# Altium PCB control_circuit.PcbDoc (part 1 of 3)
Units mil, origin at the board's own origin, x right, y up, seen from the top; angles counter-clockwise.
Board outline 3202 x 1176 mil, 2 copper layers (Top Layer, Bottom Layer); 71 components, 80 nets, 328 pads, 216 vias.
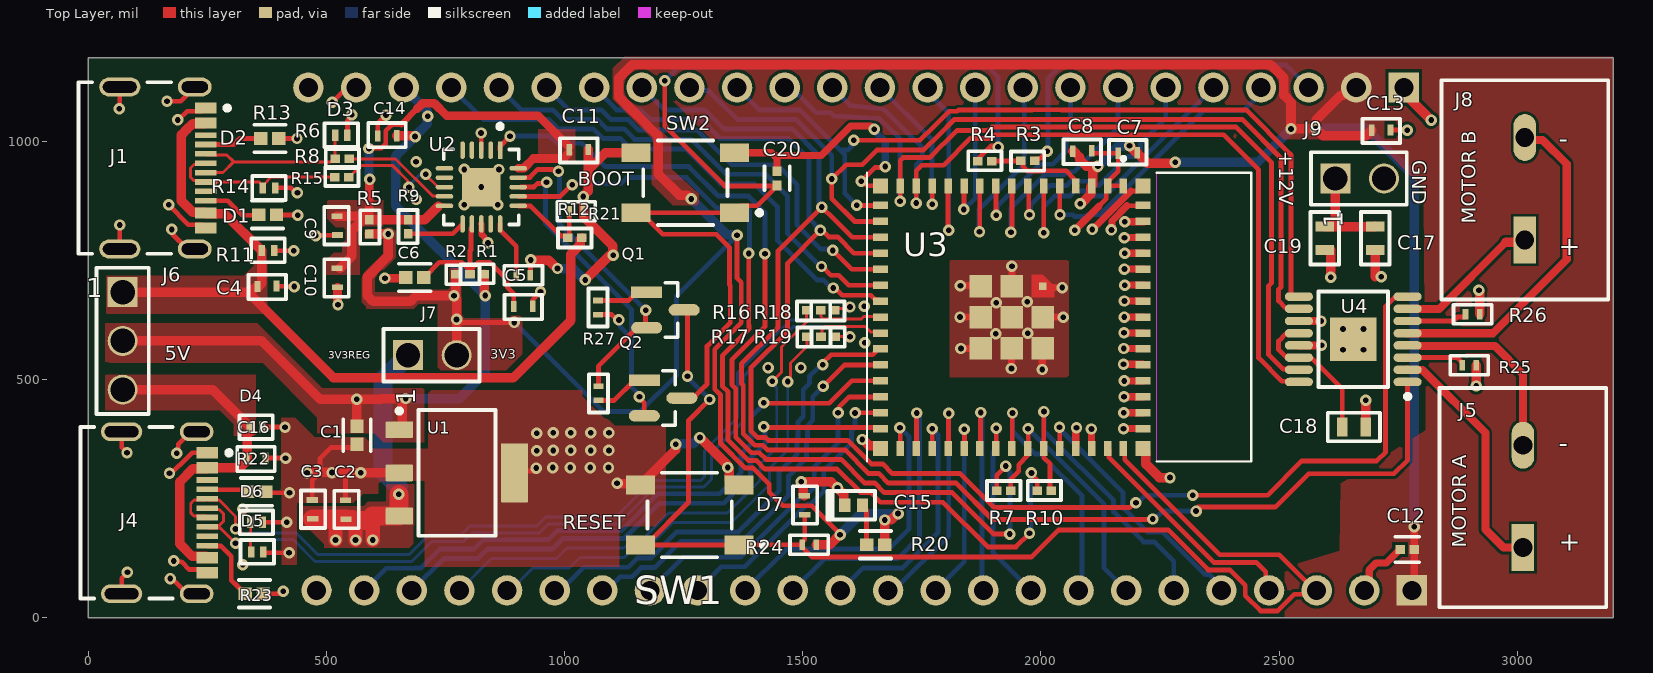
[diagram p0: Top Layer view]
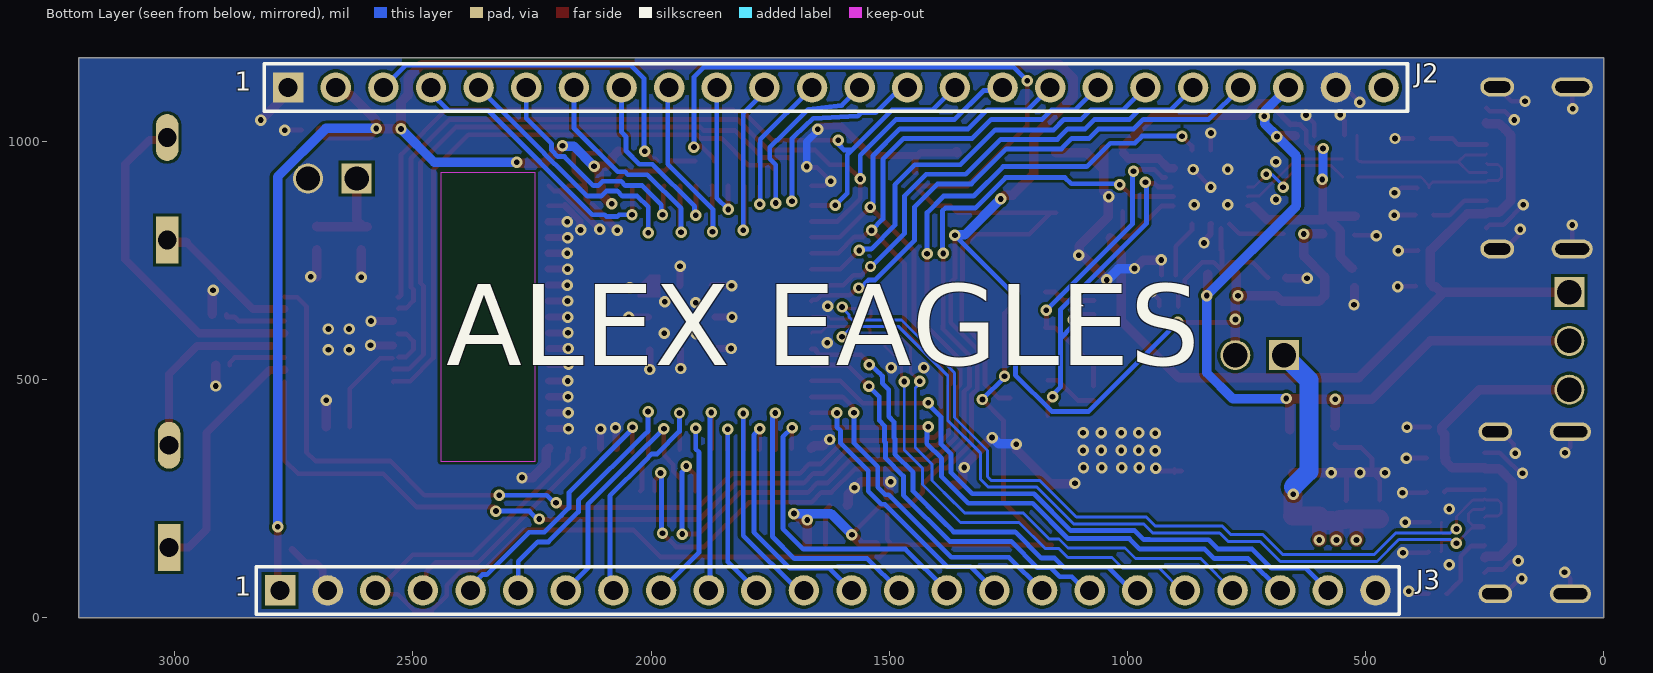
[diagram p1: Bottom Layer view, seen from below]
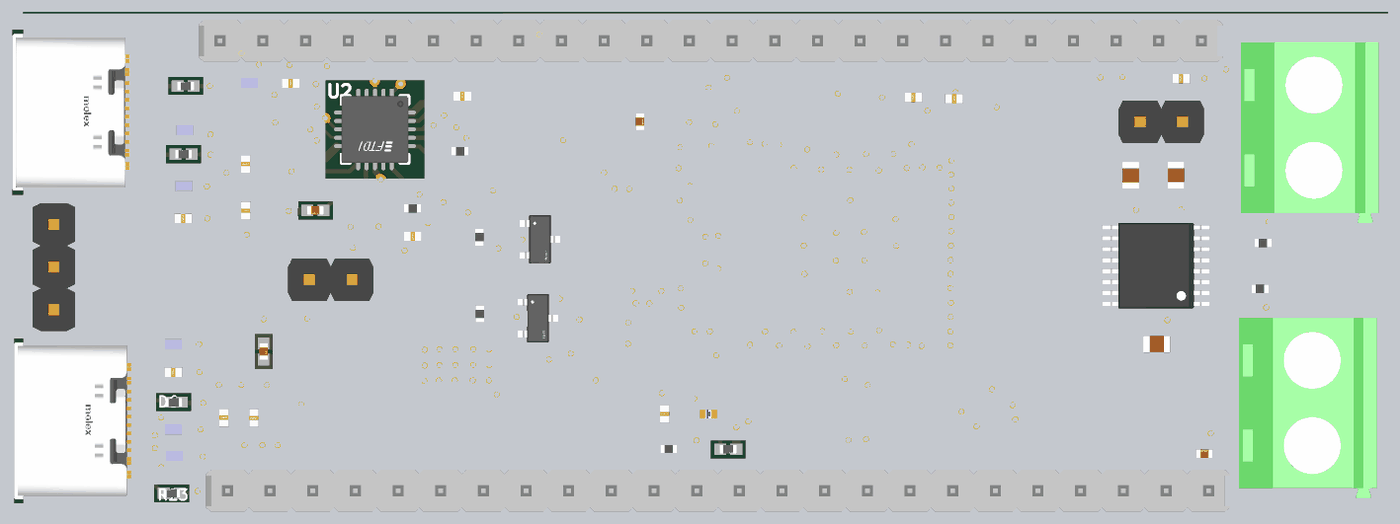
[diagram p3: 3D render of the assembled board from above, using the file's embedded part models]

## Layer stack, top to bottom
Top Solder: solder mask 0.4, Solder Resist, Dk 3.5
Top Layer: signal copper 1.4
Dielectric 1: dielectric 12.6, FR-4, Dk 4.8
Bottom Layer: signal copper 1.4
Bottom Solder: solder mask 0.4, Solder Resist, Dk 3.5

## Board outline
0,0 3202,0 3202,1176 0,1176

## Design rules (kind name [scope] priority, off if disabled: settings)
Clearance [All] p1: gap=6 ignorepadtopadclearanceinfootprint=TRUE
Clearance difclearance [InDifferentialPairClass('DIFF90')] p2: gap=8 ignorepadtopadclearanceinfootprint=FALSE
Clearance smaller [WithinRoom('RoomDefinition')or WithinRoom('usb1')or WithinRoom('usb2')] p3: gap=6 ignorepadtopadclearanceinfootprint=TRUE
ComponentClearance "0ohm resistors" [InComponent('R17') vs InComponent('R19')] p1: gap=0 collisioncheckmode=3 verticalgap=0 showdistances=FALSE
ComponentClearance "0ohm resistors_1" [InComponent('R16') vs InComponent('R18')] p2: gap=0 collisioncheckmode=3 verticalgap=0 showdistances=FALSE
ComponentClearance "0ohm resistors_2" [InComponent('R1') vs InComponent('R2')] p3: gap=0 collisioncheckmode=3 verticalgap=0 showdistances=FALSE
ComponentClearance [All] p4: gap=10 collisioncheckmode=3 verticalgap=10 showdistances=FALSE
DiffPairsRouting DIFF90 [InDifferentialPairClass('DIFF90')] p1: maxlimit=8.1 minlimit=8 mostfreqgap=8 toplayer_minwidth=6.03 toplayer_maxwidth=6.23 toplayer_prefwidth=6.03 bottomlayer_minwidth=6.03 bottomlayer_maxwidth=6.23 bottomlayer_prefwidth=6.03 maxuncoupledlength=500
MinimumSolderMaskSliver [All] p1: minsoldermaskwidth=1
PolygonConnect PolygonConnect_7 [All vs IsNamedPolygon('+3V3_L01_P010')] p1: connectstyle=Relief reliefconductorwidth=15 reliefentries=4 polygonreliefangle="90 Angle" airgapwidth=10
PolygonConnect PolygonConnect_6 [All vs IsNamedPolygon('+5V_L01_P004')] p2: connectstyle=Direct reliefconductorwidth=10 reliefentries=4 polygonreliefangle="90 Angle" airgapwidth=10
PolygonConnect PolygonConnect_5 [All vs IsNamedPolygon('+3V3_REG_L01_P003')] p3: connectstyle=Direct reliefconductorwidth=10 reliefentries=4 polygonreliefangle="90 Angle" airgapwidth=10
PolygonConnect PolygonConnect_4 [All vs IsNamedPolygon('+3V3_FTDI_L01_P002')] p4: connectstyle=Direct reliefconductorwidth=10 reliefentries=4 polygonreliefangle="90 Angle" airgapwidth=10
PolygonConnect PolygonConnect_3 [All vs IsNamedPolygon('+3V3_FTDI_L01_P001')] p5: connectstyle=Direct reliefconductorwidth=10 reliefentries=4 polygonreliefangle="90 Angle" airgapwidth=10
PolygonConnect PolygonConnect_2 [All vs IsNamedPolygon('+3V3_L01_P000')] p6: connectstyle=Direct reliefconductorwidth=15 reliefentries=4 polygonreliefangle="90 Angle" airgapwidth=10
PolygonConnect PolygonConnect_1 [All vs IsNamedPolygon('+3V3_L01_P000')] p7: connectstyle=Direct reliefconductorwidth=20 reliefentries=4 polygonreliefangle="90 Angle" airgapwidth=10
PolygonConnect [All] p8: connectstyle=Direct reliefconductorwidth=10 reliefentries=4 polygonreliefangle="90 Angle" airgapwidth=10
RoomDefinition usb2 [False vs False] p1: confinementstyle=ConfineIn formatcopy=TRUE lockcomponents=FALSE outline 959,1034 676,1034 676,758 959,758
RoomDefinition usb1 [False vs False] p2: confinementstyle=ConfineIn formatcopy=TRUE lockcomponents=FALSE outline 296,365 220,365 220,78 296,78
RoomDefinition [False vs False] p3: confinementstyle=ConfineIn formatcopy=TRUE lockcomponents=FALSE outline 306,1093 208,1093 208,800 306,800
RoutingVias [All] p1: holewidth=12 width=24 viastyle="Through Hole" minholewidth=12 minwidth=24 maxholewidth=12 maxwidth=24
SilkToSilkClearance [All] p1: silktosilkclearance=1
SilkToSolderMaskClearance [IsPad] p1: minsilkscreentomaskgap=1 clearancetoexposedcopper=TRUE
SolderMaskExpansion [All] p1: expansion=2 istentingtop=FALSE
SupplyNets "Schematic Supply Nets_8" [InNet('+3V3')] p1: voltage=0.000
SupplyNets "Schematic Supply Nets_7" [InNet('+5V')] p2: voltage=0.000
SupplyNets "Schematic Supply Nets_6" [InNet('GND')] p3: voltage=0.000
SupplyNets "Schematic Supply Nets_4" [InNet('+5V_BUS2')] p4: voltage=0.000
SupplyNets "Schematic Supply Nets_2" [InNet('+3V3_REG')] p5: voltage=0.000
SupplyNets "Schematic Supply Nets_1" [InNet('+5V_BUS1')] p6: voltage=0.000
SupplyNets "Schematic Supply Nets" [InNet('+12')] p7: voltage=0.000
Width Width_1 [All] p1: maxlimit=50 minlimit=6 preferedwidth=10 minimp=50.000000 maximp=50.000000 favimp=50.000000
25 further rules are at their usual default settings.

## Classes and differential pairs
differential pair class DIFF90: CON1_USB CON2_USB ESP_USB FTD1_USB
differential pair FTD1_USB: +FTD1_USB_P -FTD1_USB_N
differential pair ESP_USB: +ESP_USB_P -ESP_USB_N
differential pair CON2_USB: +CON2_USB_P -CON2_USB_N
differential pair CON1_USB: +CON1_USB_P -CON1_USB_N

## Components (designator, comment, footprint, x,y, rotation, side; value= is the part's Value field where it differs from the comment)
C1 "4.7UF,16V" 4.7uf_capacitor 599.08,409.49 r90 top value=4.7uF
C2 "100nf" "0603 capacitor" 540,215 r270 top
C3 "100nf" "0603 capacitor" 470,215.5 r270 top
C4 "100nf" "0603 capacitor" 363.5,696 r180 top
C5 "100nf" "0603 capacitor" 901.5,654 r180 top
C6 "4.7UF,16V" 4.7uf_capacitor 711.81,678.92 r0 top value=4.7uF
C7 "100nf" "0603 capacitor" 2194,975 r0 top
C8 "100nf" "0603 capacitor" 2075,980 r180 top
C9 "100nf" "0603 capacitor" 522.86,834.71 r90 top
C10 "100nf" "0603 capacitor" 523,725 r90 top
C11 "100nf" "0603 capacitor" 1018,983 r180 top
C12 "10uf" FP-CL17-IPC_C 2769,143 r180 top
C13 "100nf" "0603 capacitor" 2702.5,1024 r180 top
C14 "100nf" "0603 capacitor" 639,1011 r0 top
C15 "100nf" "0603 capacitor" 1503,224.5 r270 top
C16 "100nf" "0603 capacitor" 340.32,335 r180 top
C17 "0.1 µF" "CAP SMD" 2702,796.61 r90 top
C18 "2.2 µF" "CAP SMD" 2657.05,400.35 r0 top
C19 "10 µF" "CAP SMD" 2596,796.39 r90 top
C20 "100nf" FP-CL17-IPC_C 1446,922.1 r90 top
D1 "AQ3045-01ETG" SOD882 377.2,771 r180 top
D2 "AQ3045-01ETG" SOD882 379.2,902 r180 top
D3 "AQ3045-01ETG" SOD882 531,1013 r180 top
D4 "AQ3045-01ETG" SOD882 352.2,400 r180 top
D5 "AQ3045-01ETG" SOD882 354.52,138 r180 top
D6 "AQ3045-01ETG" SOD882 352.8,200 r180 top
D7 "green led" LED0402G 1606.7,236 r180 top
J1 "DX07S0 USPC" USP-C 29.39,1217.54 r270 top
J2 "HEADER" HDR_1X24_2.54MM 2762,1113 r90 bottom
J3 "0022284245" HDR_1X24_2.54MM 2779,57 r90 bottom locked
J4 "DX07S0 USPC" USP-C 33.27,493.62 r270 top
J5 "MOTOR A" HEADER 3037,-48 r90 top
J6 "FTS-103-01-F-S" "PIN HEADER MALE" 72,683.36 r0 top
J7 "PIN HEADER" "HEADER 1*2" 721,201 r90 top
J8 "MOTOR B" HEADER 3041,598 r90 top
J9 "PIN HEADER" "HEADER 1*2" 2668,572 r90 top
Q1 "SS8050-G" "SS8050-G TRANSISTOR" 1008.42,627.38 r0 top
Q2 "SS8050-G" "SS8050-G TRANSISTOR" 1003.42,442.38 r0 top
R1 "0 ohm" "27OHM RESISOR SMD" 816.31,762.06 r180 top value=0R
R2 "0 ohm" "27OHM RESISOR SMD" 786.21,679.94 r0 top value=0R
R3 "27ohm" "27OHM RESISOR SMD" 1972.19,918.44 r0 top value=27R
R4 "27ohm" "27OHM RESISOR SMD" 1882.31,999.06 r180 top value=27R
R5 "0 ohm" "27OHM RESISOR SMD" 631.06,820.16 r90 top value=0R
R6 "27ohm" "27OHM RESISOR SMD" 533.31,1004.06 r180 top value=27R
R7 "0 ohm" "27OHM RESISOR SMD" 1921.84,307.06 r180 top value=0R
R8 "27ohm" "27OHM RESISOR SMD" 532.31,966.06 r180 top value=27R
R9 "0 ohm" "27OHM RESISOR SMD" 630.94,820.84 r270 top value=0R
R10 "0 ohm" "27OHM RESISOR SMD" 2007.31,307.06 r180 top value=0R
R11 "10k" "SMD RESISTOR" 913.24,719 r180 top
R12 "4.7K ohm" "27OHM RESISOR SMD" 1021.16,756.94 r0 top value=4.7kR
R13 "5.1k" "5.1K resistor smd" 460.25,1013.56 r180 top value=5.1kR
R14 "5.1k" "5.1K resistor smd" 455.25,853.56 r180 top value=5.1kR
R15 "10k" "SMD RESISTOR" 1024.24,853 r180 top
R16 "0 ohm resistor" "27OHM RESISOR SMD" 1552.69,603.94 r0 top value=0R
R17 "0 ohm resistor" "27OHM RESISOR SMD" 1553.16,548.94 r0 top value=0R
R18 "0 ohm resistor" "27OHM RESISOR SMD" 1522.69,603.94 r0 top value=0R
R19 "0 ohm resistor" "27OHM RESISOR SMD" 1523.16,548.94 r0 top value=0R
R20 "10k" "SMD RESISTOR" 1513.24,153 r0 top
R21 "10k" "SMD RESISTOR" 1070,651 r270 top
R22 "5.1k" "5.1K resistor smd" 432.25,271.56 r180 top value=5.1kR
R23 "5.1k" "5.1K resistor smd" 427.57,57.56 r180 top value=5.1kR
R24 "1K ohm" "5.1K resistor smd" 1573.75,145.44 r0 top value=1kR
R25 "0.1Ω" "SMD RESISTOR" 2899.24,530 r0 top
R26 "0.1Ω" "SMD RESISTOR" 2906.24,637 r0 top
R27 "10k" "SMD RESISTOR" 1071,470.76 r90 top
SW1 "12VDC," "tactile switch smd" -7742.53,8113.56 r180 top
SW2 "12VDC," "tactile switch smd" -7751.46,8811.18 r180 top
U1 "TL1963A-33DCYR" TL1963A-33DCYR -2583.86,456.8 r0 top
U2 "FT231XQ-R" FT231XQ-R 809.88,1175.73 r270 top
U3 "ESP32-S3-MINI-1U-N8" ESP32-S3-MINI-1-N8 1328.96,2446.04 r270 top
U4 "DRV8848PWP" "DRV8848 PWP SMD" 2655.65,584.35 r180 top

## Footprints (in the part's own frame and the unit in brackets; to place one, negate y for a bottom-side part, rotate by r counter-clockwise, add the part's x,y. Pads: shape width x height; smd on the part's side, far side on the other; paste and mask are expansions set on the pad)
4.7uf_capacitor [mil]
  rect 28.16x26.48 smd paste+0 mask+0: 1(-45.49,35.08) 2(-7.81,35.08)
  silkscreen extent -60,6 6,64, body extent -67,14 14,56, height 10
"5.1K resistor smd" [mil]
  rect 28.16x26.48 smd paste+0 mask+0: 1(60.25,7.56) 2(97.94,7.56)
  silkscreen extent 46,-21 112,37, body extent 38,-14 120,29, height 10
"27OHM RESISOR SMD" [mm]
  rect 0.5x0.45 smd: 1(-0.373,1.043) 2(0.377,1.043)
  silkscreen extent -0.89,0.51 0.89,1.52, body extent -0.52,0.77 0.53,1.32, height 0.4
"0603 capacitor" [mm]
  rect 0.3x0.6 smd: 1(-0.8,0) 2(0.211,0.022)
  silkscreen extent -1.3,-0.6 0.7,0.7, body extent -0.82,-0.25 0.23,0.3, height 0.55
"CAP SMD" [mm]
  rect 0.55x1 smd: 1(-0.625,0) 2(0.625,0)
  silkscreen extent -1.4,-0.76 1.4,0.76, body extent -0.8,-0.51 0.8,0.49, height 0.81
"DRV8848 PWP SMD" [mm] "TSOP, 16-Leads, Body 5.00x4.40mm, Pitch 0.65mm, Thermal Pad 2.31x2.46mm, IPC Medium Density"
  oval 1.5x0.45 smd: 1(-2.9,2.275) 2(-2.9,1.625) 3(-2.9,0.975) 4(-2.9,0.325) 5(-2.9,-0.325) 6(-2.9,-0.975) 7(-2.9,-1.625) 8(-2.9,-2.275) 9(2.9,-2.275) 10(2.9,-1.625) 11(2.9,-0.975) 12(2.9,-0.325) 13(2.9,0.325) 14(2.9,0.975) 15(2.9,1.625) 16(2.9,2.275)
  rect 2.46x2.31 smd: 17(0,0)
  silkscreen extent -3.03,-2.55 1.85,3.17, body extent -3.2,-2.55 3.2,2.55, height 1.2
ESP32-S3-MINI-1-N8 [mm]
  rect 0.8x0.4 smd: 1(39.101,21.444) 2(39.101,20.594) 3(39.101,19.744) 4(39.101,18.894) 5(39.101,18.044) 6(39.101,17.194) 7(39.101,16.344) 8(39.101,15.494) 9(39.101,14.644) 10(39.101,13.794) 11(39.101,12.944) 12(39.101,12.094) 13(39.101,11.244) 14(39.101,10.394) 15(39.101,9.544) 31(53.101,9.544) 32(53.101,10.394) 33(53.101,11.244) 34(53.101,12.094) 35(53.101,12.944) 36(53.101,13.794) 37(53.101,14.644) 38(53.101,15.494) 39(53.101,16.344) 40(53.101,17.194) 41(53.101,18.044) 42(53.101,18.894) 43(53.101,19.744) 44(53.101,20.594) 45(53.101,21.444)
  rect 0.4x0.8 smd: 16(40.151,8.494) 17(41.001,8.494) 18(41.851,8.494) 19(42.701,8.494) 20(43.551,8.494) 21(44.401,8.494) 22(45.251,8.494) 23(46.101,8.494) 24(46.951,8.494) 25(47.801,8.494) 26(48.651,8.494) 27(49.501,8.494) 28(50.351,8.494) 29(51.201,8.494) 30(52.051,8.494) 46(52.051,22.494) 47(51.201,22.494) 48(50.351,22.494) 49(49.501,22.494) 50(48.651,22.494) 51(47.801,22.494) 52(46.951,22.494) 53(46.101,22.494) 54(45.251,22.494) 55(44.401,22.494) 56(43.551,22.494) 57(42.701,22.494) 58(41.851,22.494) 59(41.001,22.494) 60(40.151,22.494)
  rect 1.2x1.2 smd: 61(46.101,15.494) 67(46.101,17.144) 68(47.751,17.144) 69(44.451,15.494) 70(47.751,15.494) 71(44.451,13.844) 72(46.101,13.844) 73(47.751,13.844)
  rect 0.8x0.8 smd: 62(39.101,22.494) 63(39.101,8.494) 64(53.101,8.494) 65(53.101,22.494)
  rect 0.4x0.4 smd paste-1 mask+0: 66(44.451,17.144)
  Top Layer region: 45.051,16.544 43.851,16.544 43.851,17.144 44.451,17.744 45.051,17.744
  Keep-Out Layer region: 53.801,23.219 38.401,23.219 38.401,28.269 53.801,28.269
  Keep-Out Layer region: 53.801,23.219 38.401,23.219 38.401,28.269 53.801,28.269
  silkscreen extent 37.55,7.77 53.8,28.27, body extent 38.4,7.77 53.8,28.27, height 2.55
FP-CL17-IPC_C [mil]
  rect 20.29x18.6 smd paste+0 mask+0: 1(-14.9,0) 2(14.9,0)
  silkscreen extent -25,-27 25,27, body extent -29,-15 29,15, height 10
FT231XQ-R [mil]
  rect 37x9.55 smd paste+0 mask+0: 1(194.35,54.49)
  rrect100% 37x9.55 smd paste+0 mask+0: 2(194.35,34.8) 3(194.35,15.12) 4(194.35,-4.57) 5(194.35,-24.25) 11(349.11,-24.25) 12(349.11,-4.57) 13(349.11,15.12) 14(349.11,34.8) 15(349.11,54.49)
  rrect100% 9.55x37 smd paste+0 mask+0: 6(232.36,-62.26) 7(252.05,-62.26) 8(271.73,-62.26) 9(291.42,-62.26) 10(311.1,-62.26) 16(311.1,92.5) 17(291.42,92.5) 18(271.73,92.5) 19(252.05,92.5) 20(232.36,92.5)
  rect 80.71x80.71 smd paste-39370.1 mask+0: 21(271.73,15.12)
  silkscreen extent 139,-64 350,94, body extent 156,-100 387,131, height 10
HDR_1X24_2.54MM [mil]
  rect 64x64 hole 40: 1(0,0)
  round 64 hole 40: 2(0,-100) 3(0,-200) 4(0,-300) 5(0,-400) 6(0,-500) 7(0,-600) 8(0,-700) 9(0,-800) 10(0,-900) 11(0,-1000) 12(0,-1100) 13(0,-1200) 14(0,-1300) 15(0,-1400) 16(0,-1500) 17(0,-1600) 18(0,-1700) 19(0,-1800) 20(0,-1900) 21(0,-2000) 22(0,-2100) 23(0,-2200) 24(0,-2300)
  silkscreen extent -50,-2350 50,50, body extent -50,-2350 48,50, height 386
HEADER [mm]
  rect 2.5x1.2 hole 1: 1(4.953,0.635)
  oval 2.5x1.2 hole 1: 2(10.414,0.635)
  silkscreen extent 1.78,-3.81 13.46,5.08, body extent 2.19,-3.46 12.95,4.73, height 10
"HEADER 1*2" [mm]
  rect 1.6x1.6 hole 1.3: 1(8.89,1.27)
  round 1.6 hole 1.3: 2(8.89,-1.33)
  silkscreen extent 7.49,-2.54 10.29,2.57, body extent 7.62,-2.54 10.16,2.54, height 8.16
LED0402G [mm]
  rect 0.6x0.7 smd: 1(-0.475,0) 2(0.475,0)
  silkscreen extent -1.14,-0.76 1.4,0.76, body extent -0.5,-0.25 0.5,0.25, height 0.36
"PIN HEADER MALE" [mm]
  rect 1.6x1.6 hole 1.3: 1(0,0)
  round 1.6 hole 1.3: 2(0,-2.6) 3(0,-5.2)
  silkscreen extent -1.4,-6.5 1.4,1.3, body extent -1.27,-6.41 1.27,1.21, height 8.06
"SMD RESISTOR" [mm]
  rect 0.3x0.55 smd: 1(-0.375,0) 2(0.375,0)
  silkscreen extent -1.02,-0.51 1.02,0.51, body extent -0.5,-0.25 0.5,0.25, height 0.37
SOD882 [mm]
  rect 0.35x0.6 smd: 1(-0.325,0) 2(0.325,0)
  silkscreen extent -0.89,-0.64 0.89,0.64, body extent -0.5,-0.3 0.5,0.3, height 0.38
"SS8050-G TRANSISTOR" [mil]
  rect 65.24x24.1 smd paste+0 mask+0: 1(163.8,56.02)
  rrect100% 65.24x24.1 smd paste+0 mask+0: 2(163.8,-18.78) 3(242.58,18.62)
  silkscreen extent 203,-38 229,76, body extent 111,-58 295,95, height 10
"tactile switch smd" [mm]
  rect 1.55x1 smd paste+0 mask+0: 1(-231.347,202.214) 2(-226.097,202.214) 3(-231.347,199.014) 4(-226.097,199.014)
  silkscreen extent -232.8,198.36 -226.47,202.86, body extent -232.22,198.19 -225.22,203.04, height 0.25
TL1963A-33DCYR [mm]
  rrect11% 1.45x0.9 smd: 1(82.213,-1.581) 2(82.213,-3.881) 3(82.213,-6.181)
  rrect7% 1.45x3.15 smd: 4(88.363,-3.881)
  silkscreen extent 82.09,-7.23 87.34,-0.46, body extent 81.79,-7.13 88.79,-0.63, height 1.62
USP-C [mm]
  rect 0.6x1.15 smd paste+0 mask+0: A1B12(3.746,5.505) A4B9(4.546,5.505) B1A12(10.146,5.505) B4A9(9.346,5.505)
  rect 0.3x1.15 smd paste+0 mask+0: A5(5.696,5.505) A6(6.696,5.505) A7(7.196,5.505) A8(8.196,5.505) B5(8.696,5.505) B6(7.696,5.505) B7(6.196,5.505) B8(5.196,5.505)
  rrect100% 1x1.8 hole 1.4 slot 0.6 at 0 deg paste-2539.97 mask+0: S1(2.626,4.93) S2(11.266,4.93)
  rrect100% 1x2.2 hole 1.8 slot 0.6 at 0 deg paste-2539.97 mask+0: S3(2.626,0.93) S4(11.266,0.93)
  silkscreen extent 2.38,-1.27 11.52,6.78, body extent 2.03,-1.37 11.87,6.18, height 0.25

## Part data
C1 C6: library part CL05A475MO5NUNC, "CAP CER 4.7UF 16V X5R 0402", Capacitor Type=Ceramic, Case/Package=0402, Manufacturer=Samsung, Max Operating Temperature=85°C, Min Operating Temperature=-55°C, Package Shape=Rectangular, Package Style=SMTMeter, Rated DC Voltage (URdc)=16V, Supplier Part Number=1276-6836-6-ND, Temperature Characteristics Code=X5R, Tolerance  (fill in as +-)=20%, Category="Ceramic Capacitors", ComponentLink1Description=https://datasheet.ciiva.com:443/pdfs/VipMasterIC/IC/SEMS/SEMS-S-A0008384515/SEMS-S-A0008898881-1.pdf?src-supplier=IHS+Markit, ComponentLink1URL=https://datasheet.ciiva.com:443/pdfs/VipMasterIC/IC/SEMS/SEMS-S-A0008384515/SEMS-S-A0008898881-1.pdf?src-supplier=IHS+Markit, ComponentLink2Description=http://www.farnell.com/datasheets/2710653.pdf?src-supplier=Farnell, ComponentLink2URL=http://www.farnell.com/datasheets/2710653.pdf?src-supplier=Farnell, ComponentLink3Description=http://www.samsungsem.com/kr/support/product-search/mlcc/CL05A475MO5NUNC.jsp?src-supplier=Digikey, ComponentLink3URL=http://www.samsungsem.com/kr/support/product-search/mlcc/CL05A475MO5NUNC.jsp?src-supplier=Digikey, ComponentLink4Description=http://www.farnell.com/datasheets/2710653.pdf?src-supplier=Newark, ComponentLink4URL=http://www.farnell.com/datasheets/2710653.pdf?src-supplier=Newark, ComponentLink5Description=http://www.farnell.com/datasheets/2710653.pdf?src-supplier=Element14, ComponentLink5URL=http://www.farnell.com/datasheets/2710653.pdf?src-supplier=Element14, ComponentLink6Description=https://datasheet.octopart.com/CL05A475MO5NUNC-Samsung-Electro-Mechanics-datasheet-123102911.pdf?src-supplier=Future+Electronics, ComponentLink6URL=https://datasheet.octopart.com/CL05A475MO5NUNC-Samsung-Electro-Mechanics-datasheet-123102911.pdf?src-supplier=Future+Electronics, Dielectric Material=Ceramic, Height=0.7mm, JESD-609 Code=e3, Length=1mm, Manufacturer Part Number=CL05A475MO5NUNC, Mounting Technology="Surface Mount", Multilayer=Yes, Packaging="Tape and Reel", Pins=2, Pricing="1=0.45, 10=0.268, 50=0.1948, 100=0.1721, 500=0.1333, 1000=0.12121, 2500=0.10837, 5000=0.10058 (USD)", Reach SVHC Compliant=Yes, RoHS=Yes, RoHS Compliant=Yes, Stock=91699, Supplier=Digikey, Terminal Finish=Nickel, Termination=Wraparound, Tolerance (fill in as +-)=20%, Width=0.5mm
C2 C3 C4 C5 C7 C8 C9 C10 C11 C13 C14 C15 C16: library part C0603C102K5RECTU, "Ceramic Capacitor, Multilayer, Ceramic, 50V, 10% +Tol, 10% -Tol, X7R, 15% TC, 0.001uF, Surface Mount, 0402", Capacitor Type=Ceramic, Manufacturer=KEMET, Manufacturer Part Number=C0402C102K5RECTU, Supplier Part Number=399-C0402C102K5RECTUCT-ND, ComponentLink1Description=https://datasheet.ciiva.com:443/pdfs/VipMasterIC/IC/KEME/KEME-S-A0008958450/KEME-S-A0008958450-1.pdf?src-supplier=IHS+Markit, ComponentLink1URL=https://datasheet.ciiva.com:443/pdfs/VipMasterIC/IC/KEME/KEME-S-A0008958450/KEME-S-A0008958450-1.pdf?src-supplier=IHS+Markit, Dielectric Material=Ceramic, Pins=2, Pricing="1=0.1, 10=0.046, 50=0.0314, 100=0.0269, 500=0.0194, 1000=0.01706, 2500=0.01458, 5000=0.01308 (USD)", Reach SVHC Compliant=Yes, RoHS=Yes, RoHS Compliant=Yes, Stock=8816, Supplier=Digikey
C12 C20: library part CMP-13271-001069-1, "Cap Ceramic 100nF 10V X7R ±10% SMD 0402 +125°C Paper T/R", Capacitance=100nF, Case Code (Imperial)=0402, Case Code (Metric)=1005, Dielectric=X7R, Max Operating Temperature=125°C, Min Operating Temperature=-55°C, Package Quantity=1, Tolerance=10%, Voltage Rating=10V, Case/Package=0402, Contact Plating=Tin, Depth=0.5mm, Height=0.5mm, Length=1mm, Mount="Surface Mount", Packaging="Tape and Reel", Radiation Hardening=No, Thickness=0.022inch, Width=0.02inch
C17 C18 C19: library part "capacitor smd", "22 µF ±20% 6.3V Ceramic Capacitor X5R 0603 (1608 Metric)"
D1 D2 D3 D4 D5 D6: "TVS DIODE 5.3VWM 12VC SOD882", Leakage Current=100nA, Manufacturer=Littelfuse, Max Operating Temperature=150°C, Min Breakdown Voltage=6.8V, Min Operating Temperature=-55°C, Operating Supply Voltage=5.3V, Peak Pulse Current=3A, Peak Pulse Power=40W, Power Line Protection=No, Supplier Part Number=F9321DKR-ND, Category="TVS Diodes", ComponentLink1Description=https://www.littelfuse.com/~/media/electronics/datasheets/tvs_diode_arrays/littelfuse_tvs_diode_array_aq3045_datasheet.pdf.pdf?src-supplier=Digikey, ComponentLink1URL=https://www.littelfuse.com/~/media/electronics/datasheets/tvs_diode_arrays/littelfuse_tvs_diode_array_aq3045_datasheet.pdf.pdf?src-supplier=Digikey, ComponentLink2Description=http://www.littelfuse.com/~/media/electronics/datasheets/tvs_diode_arrays/littelfuse_tvs_diode_array_aq3045_datasheet.pdf.pdf?src-supplier=Digikey, ComponentLink2URL=http://www.littelfuse.com/~/media/electronics/datasheets/tvs_diode_arrays/littelfuse_tvs_diode_array_aq3045_datasheet.pdf.pdf?src-supplier=Digikey, Diode Type=ZENER, Manufacturer Part Number=AQ3045-01ETG, Mounting Technology="Surface Mount", Number of Bidirectional Channels=1, Number of Channels=1NUMBER, Packaging="Cut Tape", Pricing="1=0.5, 10=0.391, 100=0.2344, 500=0.217, 1000=0.14756, 2000=0.13585, 5000=0.1302 (USD)", Reverse Standoff Voltage=5.3V, RoHS=Yes, RoHS Compliant=Yes, Series="Automotive, AEC-Q101, AQ3045, SPA®", Stock=20579, Supplier=Digikey
D7: library part VLMG1500-GS08, "Single Color LED, Yellow Green, 0.5mm", Color=Green,Yellow, Color@wavelength=Green, Forward Current=30mA, Forward Voltage=2.4V, Manufacturer=Vishay, Max Operating Temperature=85°C, Min Operating Temperature=-30°C, Reverse Voltage-Max=5V, Supplier Part Number=VLMG1500-GS08CT-ND, Category=LEDs, Channels=1, ComponentLink1Description=https://datasheet.ciiva.com:443/pdfs/VipMasterIC/IC/VISH/VISH-S-A0003457490/VISH-S-A0003457490-1.pdf?src-supplier=IHS+Markit, ComponentLink1URL=https://datasheet.ciiva.com:443/pdfs/VipMasterIC/IC/VISH/VISH-S-A0003457490/VISH-S-A0003457490-1.pdf?src-supplier=IHS+Markit, ComponentLink2Description=https://datasheet.ciiva.com/12071/vlmo1500-244705-12071911.pdf?src-supplier=Mouser, ComponentLink2URL=https://datasheet.ciiva.com/12071/vlmo1500-244705-12071911.pdf?src-supplier=Mouser, ComponentLink3Description=https://datasheet.ciiva.com/30005/vlmo1500-30005134.pdf?src-supplier=Avnet, ComponentLink3URL=https://datasheet.ciiva.com/30005/vlmo1500-30005134.pdf?src-supplier=Avnet, Luminous Intensity-Nom=90mcd, Manufacturer Part Number=VLMG1500-GS08, Mounting Technology="Surface Mount", Optoelectronic Device Type="SINGLE COLOR LED", Overall Height=0.35mm, Packaging="Tape and Reel", Pins=2, Pricing="1=0.34, 10=0.265, 100=0.119, 500=0.10746, 1000=0.08827 (USD)", Reach SVHC Compliant=Yes, RoHS=Yes, RoHS Compliant=Yes, Shape=Rectangular, Size=0.5mm, Stock=90862, Supplier=Digikey, Terminal Pitch=0.95mm, Viewing Angle=130°
J1 J4: "JAEDX07S016JA3R1500 1500 Pcs/reel", Manufacturer="JAE Electronics", Manufacturer Part Number=DX07S016JA3R1500, Supplier Part Number=670-DX07S016JA3R1500CT-ND, Category="USB Connectors", ComponentLink1Description=https://www.jae.com/direct/topics/topics_file_download/?topics_id=91780&amp;ext_no=04&amp;_lang=en&amp;v=2020041313384666992409&src-supplier=Digikey, ComponentLink1URL=https://www.jae.com/direct/topics/topics_file_download/?topics_id=91780&amp;ext_no=04&amp;_lang=en&amp;v=2020041313384666992409&src-supplier=Digikey, Pricing="1=2.48, 10=1.891, 25=1.702, 50=1.5738, 100=1.4574, 250=1.31956, 500=1.22648 (USD)", RoHS=No, Stock=3411, Supplier=Digikey
J2: library part 0022284245, "CONN HEADER VERT 24POS 2.54MM", Flammability Rating="UL94 V-0", Manufacturer=Molex, Supplier Part Number=900-0022284245-ND, Category=Uncategorized, ComponentLink1Description=https://datasheet.ciiva.com:443/pdfs/VipMasterIC/IC/MOLE/MOLE-S-A0006764423/MOLE-S-A0006877704-1.pdf?src-supplier=IHS+Markit, ComponentLink1URL=https://datasheet.ciiva.com:443/pdfs/VipMasterIC/IC/MOLE/MOLE-S-A0006764423/MOLE-S-A0006877704-1.pdf?src-supplier=IHS+Markit, ComponentLink2Description=https://datasheet.ciiva.com/6814/022284363-sd-6814049.pdf?src-supplier=Digikey, ComponentLink2URL=https://datasheet.ciiva.com/6814/022284363-sd-6814049.pdf?src-supplier=Digikey, ComponentLink3Description=https://datasheet.ciiva.com/10075/0022284245-pcb-headers-10075617.pdf?src-supplier=Avnet, ComponentLink3URL=https://datasheet.ciiva.com/10075/0022284245-pcb-headers-10075617.pdf?src-supplier=Avnet, ComponentLink4Description=https://datasheet.ciiva.com/5153/0022284245-pcb-headers-228340-5153875.pdf?src-supplier=Mouser, ComponentLink4URL=https://datasheet.ciiva.com/5153/0022284245-pcb-headers-228340-5153875.pdf?src-supplier=Mouser, ComponentLink5Description=https://datasheet.ciiva.com/1433/1597854-1433759.pdf?src-supplier=Element14, ComponentLink5URL=https://datasheet.ciiva.com/1433/1597854-1433759.pdf?src-supplier=Element14, Connector Type="BOARD CONNECTOR", Contact Finish - Mating=GOLD, Contact Finish - Termination="Tin (Sn)", Contact Gender=Male, Contact Material=Brass, DIN Conformance=No, Filter Feature=No, IEC Conformance=No, JESD-609 Code=e3, Manufacturer Part Number=0022284245, Mating Information="MULTIPLE MATING PARTS AVAILABLE", MIL Conformance=No, Mixed Contacts=No, Mounting Style=STRAIGHT, Mounting Technology=Board, Number of Contacts=24, Number of Rows Loaded=1, Option="General Purpose", Pricing="1=1.45, 10=1.091, 100=0.8495, 500=0.73094, 1000=0.68963, 5000=0.61174, 10000=0.58469 (USD)", Reach SVHC Compliant=Yes, RoHS=Yes, RoHS Compliant=Yes, Stock=2909, Supplier=Digikey, Terminal Pitch=2.54mm, Termination=Solder
J3: "CONN HEADER VERT 24POS 2.54MM", Flammability Rating="UL94 V-0", Manufacturer=Molex, Supplier Part Number=900-0022284245-ND, Category=Uncategorized, ComponentLink1Description=https://datasheet.ciiva.com:443/pdfs/VipMasterIC/IC/MOLE/MOLE-S-A0006764423/MOLE-S-A0006877704-1.pdf?src-supplier=IHS+Markit, ComponentLink1URL=https://datasheet.ciiva.com:443/pdfs/VipMasterIC/IC/MOLE/MOLE-S-A0006764423/MOLE-S-A0006877704-1.pdf?src-supplier=IHS+Markit, ComponentLink2Description=https://datasheet.ciiva.com/6814/022284363-sd-6814049.pdf?src-supplier=Digikey, ComponentLink2URL=https://datasheet.ciiva.com/6814/022284363-sd-6814049.pdf?src-supplier=Digikey, ComponentLink3Description=https://datasheet.ciiva.com/10075/0022284245-pcb-headers-10075617.pdf?src-supplier=Avnet, ComponentLink3URL=https://datasheet.ciiva.com/10075/0022284245-pcb-headers-10075617.pdf?src-supplier=Avnet, ComponentLink4Description=https://datasheet.ciiva.com/5153/0022284245-pcb-headers-228340-5153875.pdf?src-supplier=Mouser, ComponentLink4URL=https://datasheet.ciiva.com/5153/0022284245-pcb-headers-228340-5153875.pdf?src-supplier=Mouser, ComponentLink5Description=https://datasheet.ciiva.com/1433/1597854-1433759.pdf?src-supplier=Element14, ComponentLink5URL=https://datasheet.ciiva.com/1433/1597854-1433759.pdf?src-supplier=Element14, Connector Type="BOARD CONNECTOR", Contact Finish - Mating=GOLD, Contact Finish - Termination="Tin (Sn)", Contact Gender=Male, Contact Material=Brass, DIN Conformance=No, Filter Feature=No, IEC Conformance=No, JESD-609 Code=e3, Manufacturer Part Number=0022284245, Mating Information="MULTIPLE MATING PARTS AVAILABLE", MIL Conformance=No, Mixed Contacts=No, Mounting Style=STRAIGHT, Mounting Technology=Board, Number of Contacts=24, Number of Rows Loaded=1, Option="General Purpose", Pricing="1=1.45, 10=1.091, 100=0.8495, 500=0.73094, 1000=0.68963, 5000=0.61174, 10000=0.58469 (USD)", Reach SVHC Compliant=Yes, RoHS=Yes, RoHS Compliant=Yes, Stock=2909, Supplier=Digikey, Terminal Pitch=2.54mm, Termination=Solder
J5 J8: library part "terminal block_TH"
J6: "CONN HEADER VERT 3POS 1.27MM", Flammability Rating="UL94 V-0", Manufacturer=Samtec, Manufacturer Series=FTS, Supplier Part Number=612-FTS-103-01-F-S-ND, Additional Feature="Low Profile", Category=Connectors, ComponentLink1Description=https://datasheet.ciiva.com:443/pdfs/VipMasterIC/IC/SAMI/SAMI-S-A0001504673/SAMI-S-A0001504673-1.pdf?src-supplier=IHS+Markit, ComponentLink1URL=https://datasheet.ciiva.com:443/pdfs/VipMasterIC/IC/SAMI/SAMI-S-A0001504673/SAMI-S-A0001504673-1.pdf?src-supplier=IHS+Markit, ComponentLink2Description=http://suddendocs.samtec.com/prints/fts-1xx-xx-xx-xx-xx-mkt.pdf?src-supplier=Digikey, ComponentLink2URL=http://suddendocs.samtec.com/prints/fts-1xx-xx-xx-xx-xx-mkt.pdf?src-supplier=Digikey, ComponentLink3Description=http://www.samtec.com/documents/webfiles/pdf/FTS.pdf?src-supplier=Avnet, ComponentLink3URL=http://www.samtec.com/documents/webfiles/pdf/FTS.pdf?src-supplier=Avnet, ComponentLink4Description=https://datasheet.octopart.com/FTS-103-01-F-S-Samtec-datasheet-116535195.pdf?src-supplier=Toby+Electronics, ComponentLink4URL=https://datasheet.octopart.com/FTS-103-01-F-S-Samtec-datasheet-116535195.pdf?src-supplier=Toby+Electronics, ComponentLink5Description=https://datasheet.octopart.com/FTS-103-01-F-S-Samtec-datasheet-151470456.pdf?src-supplier=Sager+Electronics, ComponentLink5URL=https://datasheet.octopart.com/FTS-103-01-F-S-Samtec-datasheet-151470456.pdf?src-supplier=Sager+Electronics, Connector Type="BOARD CONNECTOR", Contact Finish - Mating="GOLD (3) OVER NICKEL (50)", Contact Finish - Termination="Matte Tin (Sn) - with Nickel (Ni) barrier", Contact Gender=Male, Contact Material=Bronze, DIN Conformance=No, Filter Feature=No, IEC Conformance=No, JESD-609 Code=e3, Manufacturer Part Number=FTS-103-01-F-S, MIL Conformance=No, Mixed Contacts=No, Mounting Style=STRAIGHT, Mounting Technology=Board, Number of Contacts=3, Number of Rows Loaded=1, Option="General Purpose", Pricing="1=0.73, 50=0.6378, 100=0.5407, 500=0.4491, 1000=0.4 (USD)", Reach SVHC Compliant=Yes, RoHS=Yes, RoHS Compliant=Yes, Stock=2922, Supplier=Digikey, Terminal Pitch=1.27mm, Termination=Solder
J7 J9: library part FTS-102-01-F-S, "Board Connector, 2 Contact(s), 1 Row(s), Male, Straight, Solder Terminal", Flammability Rating="UL94 V-0", Manufacturer=Samtec, Manufacturer Series=FTS, Supplier Part Number=SAM15176-ND, Additional Feature="Low Profile", Category=Connectors, ComponentLink1Description=https://datasheet.ciiva.com:443/pdfs/VipMasterIC/IC/SAMI/SAMI-S-A0001504673/SAMI-S-A0001504673-1.pdf?src-supplier=IHS+Markit, ComponentLink1URL=https://datasheet.ciiva.com:443/pdfs/VipMasterIC/IC/SAMI/SAMI-S-A0001504673/SAMI-S-A0001504673-1.pdf?src-supplier=IHS+Markit, ComponentLink2Description=http://www.samtec.com/documents/webfiles/pdf/FTS.pdf?src-supplier=Avnet, ComponentLink2URL=http://www.samtec.com/documents/webfiles/pdf/FTS.pdf?src-supplier=Avnet, Connector Type="BOARD CONNECTOR", Contact Finish - Mating="GOLD (3) OVER NICKEL (50)", Contact Finish - Termination="Matte Tin (Sn) - with Nickel (Ni) barrier", Contact Gender=Male, Contact Material=Bronze, DIN Conformance=No, Filter Feature=No, IEC Conformance=No, JESD-609 Code=e3, Manufacturer Part Number=FTS-102-01-F-S, MIL Conformance=No, Mixed Contacts=No, Mounting Style=STRAIGHT, Mounting Technology=Board, Number of Contacts=2, Number of Rows Loaded=1, Option="General Purpose", Pricing="1=0.49, 50=0.4252, 100=0.3608, 500=0.2994, 1000=0.2625 (USD)", Reach SVHC Compliant=Yes, RoHS=Yes, RoHS Compliant=Yes, Stock=835, Supplier=Digikey, Terminal Pitch=1.27mm, Termination=Solder
Q1 Q2: "TRANS NPN 25V 1.5A SOT23-3", Manufacturer=Comchip, Supplier Part Number=641-1790-6-ND, Category=Transistors, ComponentLink1Description=https://datasheet.ciiva.com:443/pdfs/VipMasterIC/IC/COMC/COMC-S-A0004994192/COMC-S-A0004994192-1.pdf?src-supplier=IHS+Markit, ComponentLink1URL=https://datasheet.ciiva.com:443/pdfs/VipMasterIC/IC/COMC/COMC-S-A0004994192/COMC-S-A0004994192-1.pdf?src-supplier=IHS+Markit, ComponentLink2Description="http://www.comchiptech.com/admin/files/product/SS8050-G RevA181526.pdf?src-supplier=Digikey", ComponentLink2URL="http://www.comchiptech.com/admin/files/product/SS8050-G RevA181526.pdf?src-supplier=Digikey", Manufacturer Part Number=SS8050-G, Pricing="1=0.29, 10=0.2, 100=0.0978, 500=0.08154, 1000=0.05666 (USD)", Reach SVHC Compliant=Yes, RoHS=Yes, RoHS Compliant=Yes, Stock=72648, Supplier=Digikey
R1 R2 R5 R7 R9 R10 R16 R17 R18 R19: library part RC0402JR-070RL, "RES 0 OHM JUMPER 1/16W 0402", Case/Package=0402, Manufacturer=Yageo, Max Operating Temperature=155°C, Min Operating Temperature=-55°C, Package Height=0.35mm, Package Length=1mm, Package Shape=Rectangular, Package Style=SMTMeter, Package Width=0.5mm, Power=62.5mW, Rated Temperature=70°C, Resistor Type="FIXED RESISTOR", Supplier Part Number=311-0.0JRCT-ND, Category="Chip SMD Resistors", ComponentLink1Description=https://datasheet.ciiva.com:443/pdfs/VipMasterIC/IC/YAGO/YAGO-S-A0008145938/YAGO-S-A0008145938-1.pdf?src-supplier=IHS+Markit, ComponentLink1URL=https://datasheet.ciiva.com:443/pdfs/VipMasterIC/IC/YAGO/YAGO-S-A0008145938/YAGO-S-A0008145938-1.pdf?src-supplier=IHS+Markit, Construction=Chip, JESD-609 Code=e3, Manufacturer Part Number=RC0402JR-070RL, Mounting Technology="Surface Mount", Packaging="Tape and Reel", Pins=2, Pricing="1=0.1, 10=0.011, 25=0.0084, 50=0.0064, 100=0.0045, 250=0.00364, 500=0.0029, 1000=0.00214, 5000=0.00154 (USD)", Reach SVHC Compliant=Yes, RoHS=Yes, RoHS Compliant=Yes, Stock=16266726, Supplier=Digikey, Technology="METAL GLAZE/THICK FILM", Terminal Finish=Nickel, Termination=Wraparound
R3 R4 R6 R8: library part RC0402JR-0727RL, "Fixed Resistor, Metal Glaze/thick Film, 0.0625W, 27ohm, 50V, 5% +/-Tol, 100ppm/Cel, Surface Mount, 0402", Case/Package=0402, Manufacturer=Yageo, Max Operating Temperature=155°C, Min Operating Temperature=-55°C, Package Height=0.35mm, Package Length=1mm, Package Shape=Rectangular, Package Style=SMTMeter, Package Width=0.5mm, Power=62.5mW, Rated Temperature=70°C, Resistor Type="FIXED RESISTOR", Supplier Part Number=311-27JRCT-ND, Temperature Coefficient=100ppm/°C, Tolerance=5%, Working Voltage=50V, Additional Feature="LASER TRIMMABLE", Category="Chip SMD Resistors", ComponentLink1Description=https://datasheet.ciiva.com:443/pdfs/VipMasterIC/IC/YAGO/YAGO-S-A0008145938/YAGO-S-A0008145938-1.pdf?src-supplier=IHS+Markit, ComponentLink1URL=https://datasheet.ciiva.com:443/pdfs/VipMasterIC/IC/YAGO/YAGO-S-A0008145938/YAGO-S-A0008145938-1.pdf?src-supplier=IHS+Markit, ComponentLink2Description=https://datasheet.ciiva.com/12577/pyu-rc0402-51-rohs-l-6-r-12577469.pdf?src-supplier=Mouser, ComponentLink2URL=https://datasheet.ciiva.com/12577/pyu-rc0402-51-rohs-l-6-r-12577469.pdf?src-supplier=Mouser, ComponentLink3Description=https://datasheet.ciiva.com/7850/1018594-7850188.pdf?src-supplier=Element14, ComponentLink3URL=https://datasheet.ciiva.com/7850/1018594-7850188.pdf?src-supplier=Element14, ComponentLink4Description=https://datasheet.ciiva.com/7850/1018594-7850189.pdf?src-supplier=Element14, ComponentLink4URL=https://datasheet.ciiva.com/7850/1018594-7850189.pdf?src-supplier=Element14, Construction=Chip, JESD-609 Code=e3, Manufacturer Part Number=RC0402JR-0727RL, Mounting Technology="Surface Mount", Packaging="Tape and Reel", Pins=2, Pricing="1=0.1, 10=0.013, 50=0.0072, 100=0.0058, 500=0.00372, 1000=0.00312, 5000=0.00216 (USD)", Reach SVHC Compliant=Yes, RoHS=Yes, RoHS Compliant=Yes, Stock=1760333, Supplier=Digikey, Technology="METAL GLAZE/THICK FILM", Terminal Finish=Nickel, Termination=Wraparound
R11 R15 R20 R21 R25 R26 R27: library part "resistor smd", "10 kOhms ±1% 0.063W, 1/16W Chip Resistor 0402 (1005 Metric) Automotive AEC-Q200, Moisture Resistant Thick Film"
R12: library part RC0402FR-074K7L, "Fixed Resistor, Metal Glaze/thick Film, 0.0625W, 4700ohm, 50V, 1% +/-Tol, 100ppm/Cel, Surface Mount, 0402", Case/Package=0402, Manufacturer=Yageo, Max Operating Temperature=155°C, Min Operating Temperature=-55°C, Package Height=0.35mm, Package Length=1mm, Package Shape=Rectangular, Package Style=SMTMeter, Package Width=0.5mm, Power=62.5mW, Rated Temperature=70°C, Resistor Type="FIXED RESISTOR", Supplier Part Number=311-4.7KLRCT-ND, Temperature Coefficient=100ppm/°C, Tolerance=1%, Working Voltage=50V, Additional Feature="LASER TRIMMABLE", Category="Chip SMD Resistors", ComponentLink1Description=https://datasheet.ciiva.com:443/pdfs/VipMasterIC/IC/YAGO/YAGO-S-A0008145938/YAGO-S-A0008145938-1.pdf?src-supplier=IHS+Markit, ComponentLink1URL=https://datasheet.ciiva.com:443/pdfs/VipMasterIC/IC/YAGO/YAGO-S-A0008145938/YAGO-S-A0008145938-1.pdf?src-supplier=IHS+Markit, ComponentLink2Description=https://datasheet.ciiva.com/22661/1686128-22661342.pdf?src-supplier=Element14, ComponentLink2URL=https://datasheet.ciiva.com/22661/1686128-22661342.pdf?src-supplier=Element14, ComponentLink3Description=https://datasheet.ciiva.com/7850/1018594-7850022.pdf?src-supplier=Element14, ComponentLink3URL=https://datasheet.ciiva.com/7850/1018594-7850022.pdf?src-supplier=Element14, ComponentLink4Description=https://datasheet.ciiva.com/7850/1018594-7850023.pdf?src-supplier=Element14, ComponentLink4URL=https://datasheet.ciiva.com/7850/1018594-7850023.pdf?src-supplier=Element14, ComponentLink5Description=https://datasheet.ciiva.com/15215/getdatasheetpartid-328119-15215035.pdf?src-supplier=Verical, ComponentLink5URL=https://datasheet.ciiva.com/15215/getdatasheetpartid-328119-15215035.pdf?src-supplier=Verical, Construction=Chip, JESD-609 Code=e3, Manufacturer Part Number=RC0402FR-074K7L, Mounting Technology="Surface Mount", Packaging="Tape and Reel", Pins=2, Pricing="1=0.1, 10=0.015, 50=0.0088, 100=0.0073, 500=0.00488, 1000=0.00417, 5000=0.00297 (USD)", Reach SVHC Compliant=Yes, RoHS=Yes, RoHS Compliant=Yes, Stock=4079848, Supplier=Digikey, Technology="METAL GLAZE/THICK FILM", Terminal Finish=Nickel, Termination=Wraparound
R13 R14 R22 R23: library part AC0402FR-075K1L, "Fixed Resistor, Metal Glaze/thick Film, 0.0625W, 5100ohm, 50V, 1% +/-Tol, 100ppm/Cel, Surface Mount, 0402", Case/Package=0402, Manufacturer=Yageo, Max Operating Temperature=155°C, Min Operating Temperature=-55°C, Package Height=0.32mm, Package Length=1mm, Package Shape=Rectangular, Package Style=SMTMeter, Package Width=0.5mm, Power=62.5mW, Rated Temperature=70°C, Resistor Type="FIXED RESISTOR", Supplier Part Number=YAG3503CT-ND, Temperature Coefficient=100ppm/°C, Tolerance=1%, Working Voltage=50V, Additional Feature="LASER TRIMMABLE", Category="Chip SMD Resistors", ComponentLink1Description=https://datasheet.ciiva.com:443/pdfs/VipMasterIC/IC/YAGO/YAGO-S-A0003597364/YAGO-S-A0003597364-1.pdf?src-supplier=IHS+Markit, ComponentLink1URL=https://datasheet.ciiva.com:443/pdfs/VipMasterIC/IC/YAGO/YAGO-S-A0003597364/YAGO-S-A0003597364-1.pdf?src-supplier=IHS+Markit, ComponentLink2Description=https://datasheet.octopart.com/AC0402FR-075K1L-Yageo-datasheet-166720450.pdf?src-supplier=Future+Electronics, ComponentLink2URL=https://datasheet.octopart.com/AC0402FR-075K1L-Yageo-datasheet-166720450.pdf?src-supplier=Future+Electronics, ComponentLink3Description=http://www.yageo.com/documents/recent/PYu-AC_51_RoHS_L_2_revised.pdf?src-supplier=Future+Electronics, ComponentLink3URL=http://www.yageo.com/documents/recent/PYu-AC_51_RoHS_L_2_revised.pdf?src-supplier=Future+Electronics, Construction=Chip, JESD-609 Code=e3, Manufacturer Part Number=AC0402FR-075K1L, Mounting Technology="Surface Mount", Packaging="Tape and Reel", Pins=2, Pricing="1=0.1, 10=0.019, 50=0.0116, 100=0.0095, 500=0.00638, 1000=0.00544, 5000=0.00391 (USD)", Reach SVHC Compliant=Yes, Reference Standard=AEC-Q200, RoHS=Yes, RoHS Compliant=Yes, Stock=79765, Supplier=Digikey, Technology="METAL GLAZE/THICK FILM", Terminal Finish=Nickel, Termination=Wraparound
R24: library part RC0402FR-071KL, "RES 1K OHM 1% 1/16W 0402", Case/Package=0402, Manufacturer=Yageo, Max Operating Temperature=155°C, Min Operating Temperature=-55°C, Package Height=0.35mm, Package Length=1mm, Package Shape=Rectangular, Package Style=SMTMeter, Package Width=0.5mm, Power=62.5mW, Rated Temperature=70°C, Resistor Type="FIXED RESISTOR", Supplier Part Number=311-1.00KLRCT-ND, Temperature Coefficient=100ppm/°C, Tolerance=1%, Working Voltage=50V, Additional Feature="LASER TRIMMABLE", Category="Chip SMD Resistors", ComponentLink1Description=https://datasheet.ciiva.com:443/pdfs/VipMasterIC/IC/YAGO/YAGO-S-A0008145938/YAGO-S-A0008145938-1.pdf?src-supplier=IHS+Markit, ComponentLink1URL=https://datasheet.ciiva.com:443/pdfs/VipMasterIC/IC/YAGO/YAGO-S-A0008145938/YAGO-S-A0008145938-1.pdf?src-supplier=IHS+Markit, ComponentLink2Description=https://datasheet.ciiva.com/11819/0900766b80c66297-11819477.pdf?src-supplier=Rs, ComponentLink2URL=https://datasheet.ciiva.com/11819/0900766b80c66297-11819477.pdf?src-supplier=Rs, ComponentLink3Description=https://datasheet.ciiva.com/22747/1018594-22747513.pdf?src-supplier=Element14, ComponentLink3URL=https://datasheet.ciiva.com/22747/1018594-22747513.pdf?src-supplier=Element14, ComponentLink4Description=https://datasheet.ciiva.com/12666/pyu-rc0402-51-rohs-l-6-r-12666741.pdf?src-supplier=Mouser, ComponentLink4URL=https://datasheet.ciiva.com/12666/pyu-rc0402-51-rohs-l-6-r-12666741.pdf?src-supplier=Mouser, ComponentLink5Description=https://datasheet.ciiva.com/17063/pyu-rc0402-51-rohs-l-6-r-17063193.pdf?src-supplier=Future+Electronics, ComponentLink5URL=https://datasheet.ciiva.com/17063/pyu-rc0402-51-rohs-l-6-r-17063193.pdf?src-supplier=Future+Electronics, ComponentLink6Description=https://datasheet.ciiva.com/7983/1018594-7983502.pdf?src-supplier=Element14, ComponentLink6URL=https://datasheet.ciiva.com/7983/1018594-7983502.pdf?src-supplier=Element14, ComponentLink7Description=https://datasheet.ciiva.com/7849/1018594-7849869.pdf?src-supplier=Element14, ComponentLink7URL=https://datasheet.ciiva.com/7849/1018594-7849869.pdf?src-supplier=Element14, ComponentLink8Description=https://datasheet.ciiva.com/7849/1018594-7849871.pdf?src-supplier=Element14, ComponentLink8URL=https://datasheet.ciiva.com/7849/1018594-7849871.pdf?src-supplier=Element14, Construction=Chip, JESD-609 Code=e3, Manufacturer Part Number=RC0402FR-071KL, Mounting Technology="Surface Mount", Packaging="Tape and Reel", Pins=2, Pricing="1=0.1, 10=0.015, 50=0.0088, 100=0.0073, 500=0.00488, 1000=0.00417, 5000=0.00297 (USD)", Reach SVHC Compliant=Yes, RoHS=Yes, RoHS Compliant=Yes, Stock=7200832, Supplier=Digikey, Technology="METAL GLAZE/THICK FILM", Terminal Finish=Nickel, Termination=Wraparound
SW1 SW2: library part PTS647SM38SMTR2LFS, "Keypad Switch, 1 Switches, SPST, Momentary-tactile, 0.05A, 12VDC, 2.26N, Solder Terminal, Surface Mount-straight", Manufacturer="ITT C&K", Supplier Part Number=PTS647SM38SMTR2LFSDKR-ND, Category="Tactile Switches", ComponentLink1Description=https://datasheet.ciiva.com:443/pdfs/VipMasterIC/IC/CKCI/CKCI-S-A0009257890/CKCI-S-A0009257890-1.pdf?src-supplier=IHS+Markit, ComponentLink1URL=https://datasheet.ciiva.com:443/pdfs/VipMasterIC/IC/CKCI/CKCI-S-A0009257890/CKCI-S-A0009257890-1.pdf?src-supplier=IHS+Markit, ComponentLink2Description=https://www.ckswitches.com/media/2567/pts647.pdf?src-supplier=Digikey, ComponentLink2URL=https://www.ckswitches.com/media/2567/pts647.pdf?src-supplier=Digikey, Manufacturer Part Number=PTS647SM38SMTR2LFS, Pricing="1=0.26, 10=0.249, 25=0.236, 100=0.2138, 250=0.19488, 500=0.18114, 1000=0.15453 (USD)", RoHS=No, RoHS Compliant=Yes, Stock=30950, Supplier=Digikey
U1: "IC REG LINEAR 3.3V 1.5A SOT223-4", Case/Package=SOP, Dropout Voltage1-Max=550mV, Dropout Voltage1-Nom=340mV, Input Voltage Absolute-Max=20V, Manufacturer="Texas Instruments", Min Input Voltage=3.8V, Operating Temperature, TJ-Max=125°C, Operating Temperature, TJ-Min=-40°C, Output Current1-Max=1.5A, Output Voltage1-Max=3.4V, Output Voltage1-Min=3.2V, Output Voltage1-Nom=3.3V, Package Body Material=Plastic, Package Shape=Rectangular, Package Style="SMALL OUTLINEMeter", Peak Reflow Temperature (Cel)=260°C, Supplier Part Number=296-24897-1-ND, Voltage Tolerance-Max=3%, Adjustability=FIXED, Category="Voltage Regulators - Linear", Channels=1, ComponentLink1Description=https://www.ti.com:443/lit/ds/symlink/tl1963a.pdf?src-supplier=IHS+Markit, ComponentLink1URL=https://www.ti.com:443/lit/ds/symlink/tl1963a.pdf?src-supplier=IHS+Markit, ComponentLink2Description=https://datasheet.ciiva.com/2046/-2046068.pdf?src-supplier=Digikey, ComponentLink2URL=https://datasheet.ciiva.com/2046/-2046068.pdf?src-supplier=Digikey, Height - Seated (Max)=1.8mm, JESD-30 Code=R-PDSO-G4, JESD-609 Code=e3, Length=6.5mm, Line Regulation-Max=0.01%, Load Regulation-Max=0.07%, Manufacturer Part Number=TL1963A-33DCYR, Max Supply Voltage=20V, Moisture Sensitivity Level=2, Number of Outputs=1, Packaging="Tape and Reel", Pins=4, Pricing="1=3.15, 10=2.273, 25=2.054, 100=1.8138, 250=1.69916, 500=1.63004, 1000=1.57313 (USD)", Qualification Status="Not Qualified", Reach SVHC Compliant=Yes, Regulator Type="FIXED POSITIVE SINGLE OUTPUT LDO REGULATOR", RoHS=Yes, RoHS Compliant=Yes, Stock=2176, Supplier=Digikey, Surface Mount=Yes, Technology=BIPOLAR, Terminal Finish=Tin, Terminal Form="Gull Wing", Terminal Pitch=2.3mm, Terminal Position=DUAL, Width=3.5mm
U2: "Microprocessor Circuit, CMOS", Case/Package=HVQCCN, Manufacturer=FTDI, Max Operating Temperature=85°C, Max Supply Current=8.4mA, Max Supply Voltage=5.5V, Min Operating Temperature=-40°C, Min Supply Voltage=2.97V, Nominal Supply Voltage=5V, Package Shape=Square, Package Style="CHIP CARRIER, HEAT SINK/SLUG, VERY THIN PROFILEMeter", Power Supplies=3.3/5V, Supplier Part Number=768-1128-6-ND, Temperature Grade=INDUSTRIAL, Category="Interface ICs", ComponentLink1Description=https://datasheet.ciiva.com:443/pdfs/VipMasterIC/IC/FTDI/FTDIS00099/FTDIS00099-1.pdf?src-supplier=IHS+Markit, ComponentLink1URL=https://datasheet.ciiva.com:443/pdfs/VipMasterIC/IC/FTDI/FTDIS00099/FTDIS00099-1.pdf?src-supplier=IHS+Markit, ComponentLink2Description=https://datasheet.ciiva.com/1787/ds-ft231x-1787312.pdf?src-supplier=Digikey, ComponentLink2URL=https://datasheet.ciiva.com/1787/ds-ft231x-1787312.pdf?src-supplier=Digikey, ComponentLink3Description=https://datasheet.ciiva.com/4787/ds-ft231x-13571-4787570.pdf?src-supplier=Mouser, ComponentLink3URL=https://datasheet.ciiva.com/4787/ds-ft231x-13571-4787570.pdf?src-supplier=Mouser, ComponentLink4Description=https://datasheet.ciiva.com/30475/0900766b811020d3-30475405.pdf?src-supplier=Rs, ComponentLink4URL=https://datasheet.ciiva.com/30475/0900766b811020d3-30475405.pdf?src-supplier=Rs, ComponentLink5Description=https://datasheet.ciiva.com/1787/ft-x-series-1787313.pdf?src-supplier=Digikey, ComponentLink5URL=https://datasheet.ciiva.com/1787/ft-x-series-1787313.pdf?src-supplier=Digikey, ComponentLink6Description=https://datasheet.ciiva.com/1787/ft-x-series-1787314.pdf?src-supplier=Digikey, ComponentLink6URL=https://datasheet.ciiva.com/1787/ft-x-series-1787314.pdf?src-supplier=Digikey, Height - Seated (Max)=0.8mm, JESD-30 Code=S-XQCC-N20, Length=4mm, Manufacturer Part Number=FT231XQ-R, Pins=20, Pricing="1=2.34, 25=2.27, 100=2.2, 250=2, 500=1.82002, 1000=1.7625 (USD)", Qualification Status="Not Qualified", Reach SVHC Compliant=Yes, RoHS=Yes, RoHS Compliant=Yes, Stock=61863, Supplier=Digikey, Surface Mount=Yes, Technology=CMOS, Terminal Form="No Lead", Terminal Pitch=0.5mm, Terminal Position=QUAD, Width=4mm
U3: Manufacturer="Espressif Systems", Supplier Part Number=1965-ESP32-S3-MINI-1U-N8CT-ND, Category=LDO, Manufacturer Part Number=ESP32-S3-MINI-1U-N8, Pricing="1=3.1 (USD)", RoHS=No, Stock=2332, Supplier=Digikey
U4: library part "DRV8848 SMD", "Bipolar Motor Driver Power MOSFET PWM 16-HTSSOP", Current - Output=4A, Manufacturer="Texas Instruments", Operating Temperature="-40°C ~ 150°C", Package / Case=16-PowerTSSOP, Voltage - Load="4V ~ 18V", ComponentLink1Description=datasheet, ComponentLink1URL=https://www.ti.com/general/docs/suppproductinfo.tsp?distId=10&gotoUrl=https%3A%2F%2Fwww.ti.com%2Flit%2Fgpn%2Fdrv8848, Manufacturer Product Number=DRV8848PWP, Voltage - Supply="4V ~ 18V"

## Via types
v1: diameter 24, hole 12, Top Layer to Bottom Layer, 216 vias

## Nets (pads, with @x,y where several pads share a name; then routed paths per layer and width w, separated by ;. In a path a pad name is that pad's centre, name@x,y a point inside that pad or via, vN(x,y) a via of type N, cw(c..) or ccw(c..) an arc to the next point about the centre after c; other vN are vias at no path point)
+3V3: C7.2 C8.2 C12.1 C13.2 J2.2 J3.1 J7.2 R2.1 R5.1 R20.2 R24.2 U3.3 | length 6604.6
  Top Layer w10: v1@783.23,619.8 v1(894.16,619.8) ; v1(1362,803) 1362,712.81 1370.55,704.27 1370.55,619 1315.18,563.64 1315.18,479.53 1327.18,467.53 1327.18,365.82 1379,314 1395.74,314 1429.35,280.39 1429.35,263.65 1458,235 1518.35,235 1578.21,175.14 v1(1578.21,174.19)
  Top Layer w15: J3.1@2783.9,61.9 C12.1@2783.9,143 2783.9,190.44 v1(2783.96,190.49)
  Top Layer w20: R5.1@590,805.47 v1(629.35,805.47) 629.35,758.86 586,715.51 586,675.72 597.72,664 676.23,664 688.03,675.8 v1(767.62,675.8) ; R2.1@771.53,721 771.53,679.71 v1(767.62,675.8) ; J7.2@773.36,551 773.36,625.88 v1(773.1,626.14) 773.1,669.24 767.62,674.72 v1(767.62,675.8) ; v1(1265.95,879.04) 1264.86,879.04 1256.9,887 1241,887 1196.51,931.49 1196.51,1010.61 1114,1093.12 1114,1132.88 1142.12,1161 2481.88,1161 2510,1132.88 2510,1097.12 2525,1082.12 v1(2525,1026) 2525.5,1026.5 2576.5,1026.5 v1(2577,1027) ; R20.2@1528,153 1557.02,153 v1(1578.21,174.19) ; R24.2@1671.68,153 1671.84,153.16 1671.84,204.84 v1(1672,205) 1672.77,205.77 1686.15,205.77 1698.92,218.53 v1(1700,218.53) ; C8.2@2066.71,979.14 2068.99,979.14 2081.5,966.64 2081.5,961.83 2095.16,948.16 2118.83,948.16 v1(2119.59,947.4) 2119.59,946.31 2108.41,935.13 2108.41,908.76 U3.3@2106.28,906.63 2104.16,904.5 2104.16,888.89 2084.97,869.71 2083.06,869.71 v1(2082.3,868.94) ; v1(2185.93,990.92) 2185.93,989.94 2200.01,975.86 C7.2@2202.29,975.86 2223.68,954.47 2281.68,954.47 v1(2281.68,956.19) ; J2.2@2662,1113 2650.09,1113 2634.25,1097.16 2630.16,1097.16 2577.77,1044.77 2577.77,1027.77 v1(2577,1027) ; C13.2@2694.21,1023.14 2693.64,1023.14 2682.5,1012 2592,1012 v1(2577,1027) ; J3.1@2779,57 J3.1@2783.9,61.9
  Bottom Layer w10: v1(894.16,619.8) 1080.96,433 1158.53,433 1234.87,509.34 1234.87,675.87 v1(1362,803)